# Altium PCB M.2 1216 Stencil.PcbDoc
Units mil, origin at the board's own origin, x right, y up, seen from the top; angles counter-clockwise.
Board outline 708.66 x 866.14 mil, 2 copper layers (Top Layer, Bottom Layer); 1 components, 0 nets, 108 pads, 0 vias.
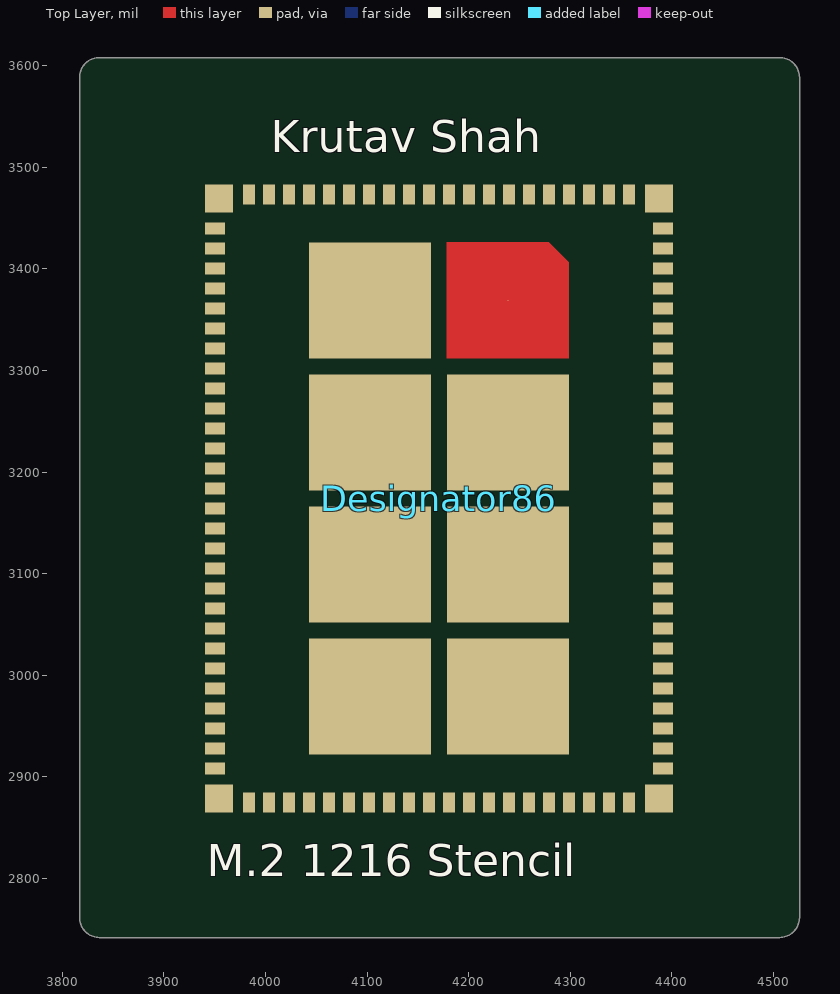
[diagram p0: Top Layer view]
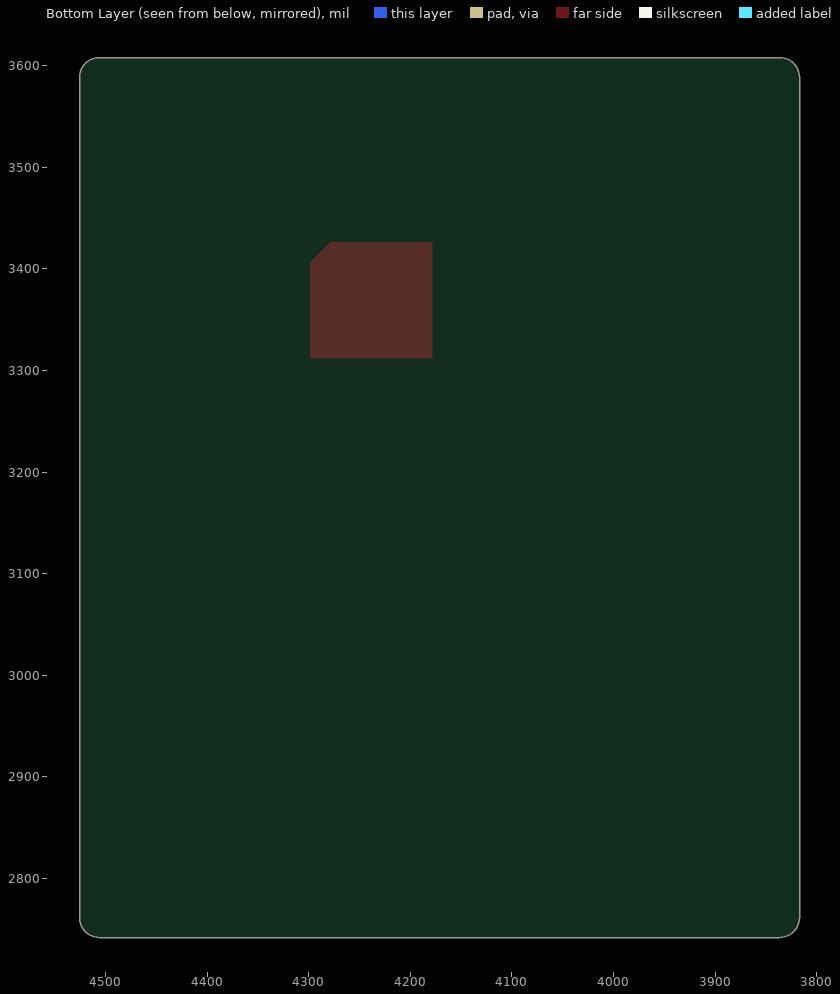
[diagram p1: Bottom Layer view, seen from below]

## Layer stack, top to bottom
Top Solder: solder mask 0.4, Solder Resist, Dk 3.5
Top Layer: signal copper 1.4
Dielectric 1: dielectric 12.6, FR-4, Dk 4.8
Bottom Layer: signal copper 1.4
Bottom Solder: solder mask 0.4, Solder Resist, Dk 3.5

## Board outline
3816.89,2761.57 ccw(c3836.57,2761.57) 3836.57,2741.89 4505.87,2741.89 ccw(c4505.87,2761.57) 4525.55,2761.57 4525.55,3588.35 ccw(c4505.87,3588.35) 4505.87,3608.03 3836.57,3608.03 ccw(c3836.57,3588.35) 3816.89,3588.35

## Design rules (kind name [scope] priority, off if disabled: settings)
Clearance [All] p1: gap=10 ignorepadtopadclearanceinfootprint=FALSE except(0: Arc-Hole Track-Hole SMDPad-Hole THPad-Hole Via-Hole Fill-Hole Poly-Hole Region-Hole Text-Hole)
PolygonConnect [All] p1: connectstyle=Relief reliefconductorwidth=10 reliefentries=4 polygonreliefangle="90 Angle" airgapwidth=10
RoutingVias [All] p1: holewidth=28 width=50 viastyle="Through Hole" minholewidth=28 minwidth=50 maxholewidth=28 maxwidth=50
SolderMaskExpansion [All] p1: expansion=4 istentingtop=FALSE
Width [All] p1: maxlimit=10 minlimit=10 preferedwidth=10
30 further rules are at their usual default settings.

## Components (designator, comment, footprint, x,y, rotation, side; value= is the part's Value field where it differs from the comment)
Designator86 "Comment" PCBComponent_1 3934.25,2859.25 r0 top

## Footprints (in the part's own frame and the unit in brackets; to place one, negate y for a bottom-side part, rotate by r counter-clockwise, add the part's x,y. Pads: shape width x height; smd on the part's side, far side on the other; paste and mask are expansions set on the pad)
PCBComponent_1 [mm]
  rect 0.5x0.3 smd mask+0.05: 1(0.4,1.25) 1(0.4,1.75) 1(0.4,2.25) 1(0.4,2.75) 1(0.4,3.25) 1(0.4,3.75) 1(0.4,4.25) 1(0.4,4.75) 1(0.4,5.25) 1(0.4,5.75) 1(0.4,6.25) 1(0.4,6.75) 1(0.4,7.25) 1(0.4,7.75) 1(0.4,8.25) 1(0.4,8.75) 1(0.4,9.25) 1(0.4,9.75) 1(0.4,10.25) 1(0.4,10.75) 1(0.4,11.25) 1(0.4,11.75) 1(0.4,12.25) 1(0.4,12.75) 1(0.4,13.25) 1(0.4,13.75) 1(0.4,14.25) 1(0.4,14.75) 1(11.6,1.25) 1(11.6,1.75) 1(11.6,2.25) 1(11.6,2.75) 1(11.6,3.25) 1(11.6,3.75) 1(11.6,4.25) 1(11.6,4.75) 1(11.6,5.25) 1(11.6,5.75) 1(11.6,6.25) 1(11.6,6.75) 1(11.6,7.25) 1(11.6,7.75) 1(11.6,8.25) 1(11.6,8.75) 1(11.6,9.25) 1(11.6,9.75) 1(11.6,10.25) 1(11.6,10.75) 1(11.6,11.25) 1(11.6,11.75) 1(11.6,12.25) 1(11.6,12.75) 1(11.6,13.25) 1(11.6,13.75) 1(11.6,14.25) 1(11.6,14.75)
  rect 0.3x0.5 smd mask+0.05: 1(1.25,15.6) 1(1.25,0.4) 1(1.75,0.4) 1(1.75,15.6) 1(2.25,15.6) 1(2.25,0.4) 1(2.75,0.4) 1(2.75,15.6) 1(3.25,15.6) 1(3.25,0.4) 1(3.75,15.6) 1(3.75,0.4) 1(4.25,0.4) 1(4.25,15.6) 1(4.75,15.6) 1(4.75,0.4) 1(5.25,0.4) 1(5.25,15.6) 1(5.75,15.6) 1(5.75,0.4) 1(6.25,15.6) 1(6.25,0.4) 1(6.75,0.4) 1(6.75,15.6) 1(7.25,15.6) 1(7.25,0.4) 1(7.75,0.4) 1(7.75,15.6) 1(8.25,15.6) 1(8.25,0.4) 1(8.75,15.6) 1(8.75,0.4) 1(9.25,0.4) 1(9.25,15.6) 1(9.75,15.6) 1(9.75,0.4) 1(10.25,0.4) 1(10.25,15.6) 1(10.75,15.6) 1(10.75,0.4)
  rect 3.05x2.9 smd mask+0.05: G1(4.275,3.05) G1(4.275,6.35) G1(4.275,9.65) G1(4.275,12.95) G1(7.725,3.05) G1(7.725,6.35) G1(7.725,9.65)
  round 0.025 smd mask+0.05: G1(7.725,12.95)
  rect 0.7x0.7 smd mask+0.05: G1(11.5,15.5) G2(11.5,0.5) G3(0.5,0.5) G4(0.5,15.5)
  Top Layer region: 8.75,14.4 9.25,13.9 9.25,11.5 6.2,11.5 6.2,14.4

## Nets (pads, with @x,y where several pads share a name; then routed paths per layer and width w, separated by ;. In a path a pad name is that pad's centre, name@x,y a point inside that pad or via, vN(x,y) a via of type N, cw(c..) or ccw(c..) an arc to the next point about the centre after c; other vN are vias at no path point)
pads on no net: Designator86.1 Designator86.G1 Designator86.G2 Designator86.G3 Designator86.G4

## Text inside footprints (layer, text, board x,y; h text height)
Designator86: Top Overlay "M.2 1216 Stencil" at 3942.2,2802.18 h31.5; Top Overlay "Krutav Shah" at 4005.17,3514.76 h31.5